# EAGLE board uart_gerber (EAGLE 8.5.0)
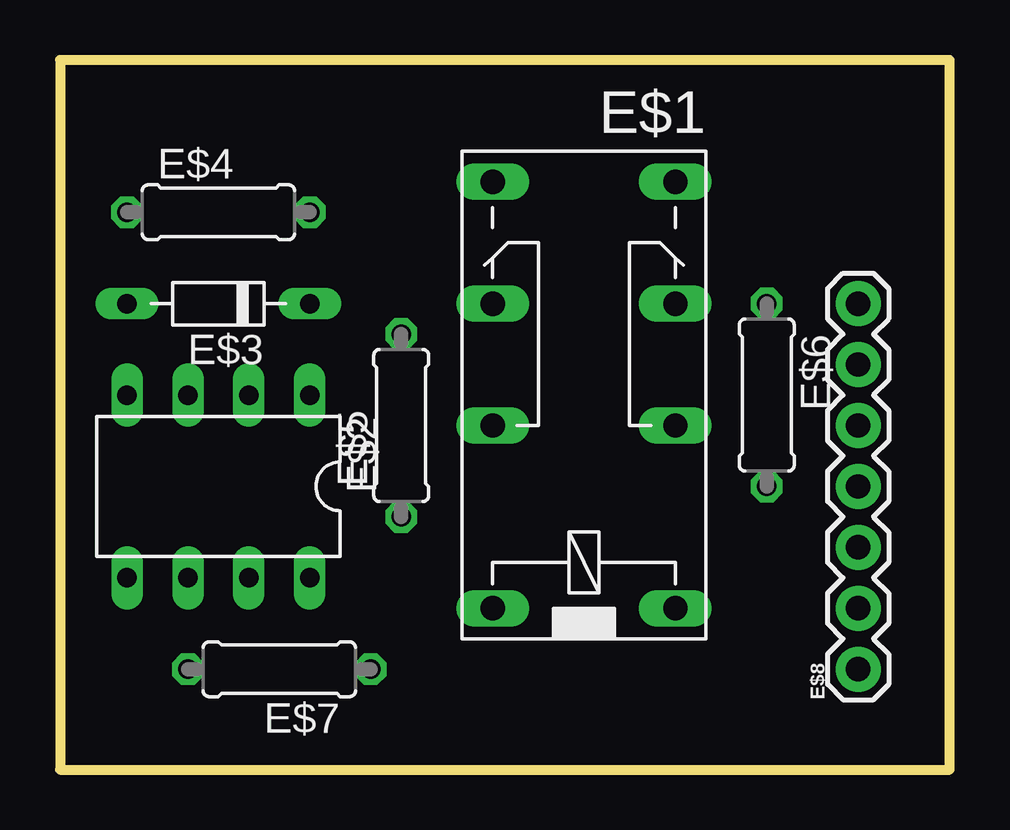
[diagram p0: board, top side]
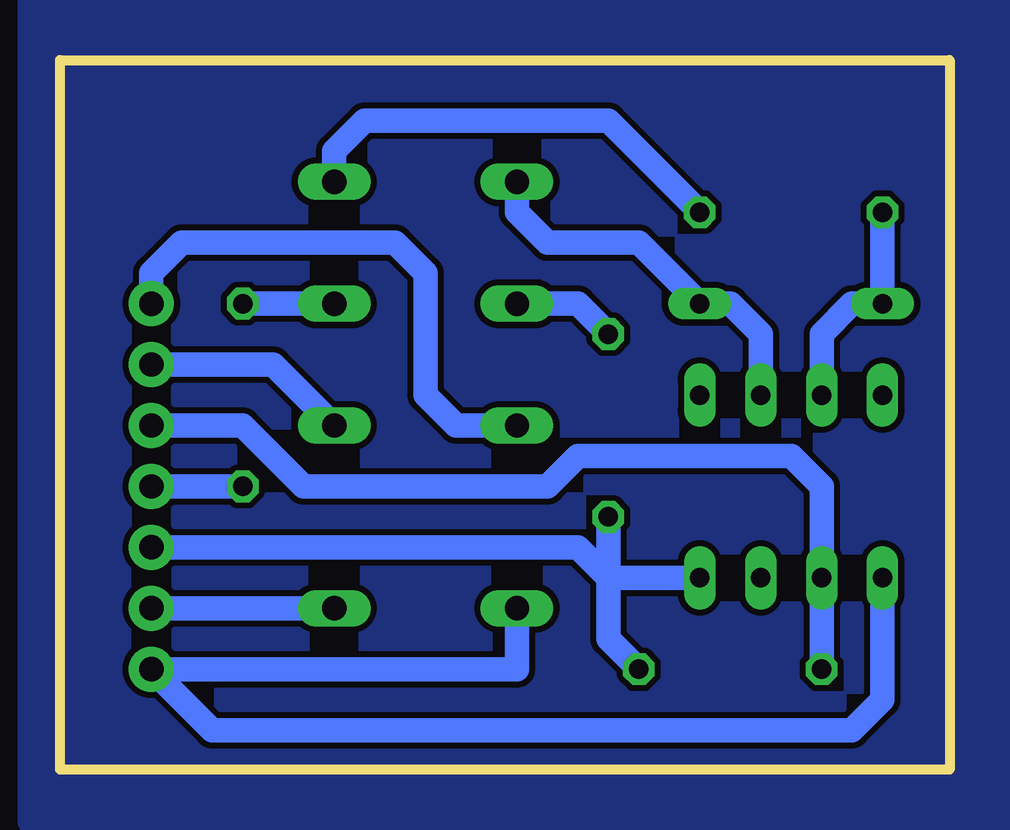
[diagram p1: board, bottom side, seen from below]

Size 37.08 x 29.59 mm. Coordinates in mm from the lower left corner, seen from the top.
Outline: 0,29.59 0,0 37.08,0 37.08,29.59 0,29.59
Copper layers (1*16): Top 0.035mm / dielectric 1.5mm / Bottom 0.035mm
Design rules "default *": minimum track width 6mil, minimum drill 0.35mm, track to track 6mil, track to pad 6mil, pad to pad 6mil, via to via 6mil, smd to smd 6mil, copper to edge 0mil, drill to drill 6mil, minimum pad ring 10mil, minimum via ring 8mil, stop-mask expansion 4mil, vias tented up to drill 0mil, thermal gap 10mil

## Footprints (pad centres in the part's own frame; a part is rotated, then mirrored left to right if it is on the bottom)
351 = drill 1.016 long: 1 -3.81,-3.81; 16 -3.81,3.81; O1 8.89,-3.81; O2 8.89,3.81; P1 3.81,-3.81; P2 3.81,3.81; S1 13.97,-3.81; S2 13.97,3.81
DIL08 = drill 0.813 long: 1 -3.81,-3.81; 2 -1.27,-3.81; 3 1.27,-3.81; 4 3.81,-3.81; 5 3.81,3.81; 6 1.27,3.81; 7 -1.27,3.81; 8 -3.81,3.81
D-7.5 = drill 0.813 long: A 3.81,0; C -3.81,0
0207/7 = drill 0.813 octagon: 1 -3.81,0; 2 3.81,0
1X07 = drill 1.016 pad 1.88: 1 0,0; 2 2.54,0; 3 5.08,0; 4 7.62,0; 5 10.16,0; 6 12.7,0; 7 15.24,0

## Placement (x,y rotation side)
E$1  [351]  21.84,10.54 90 top
E$2  [DIL08]  6.6,11.81 180 top
E$3  [D-7.5]  6.6,19.43 180 top
E$4  [0207/7]  6.6,23.24 0 top
E$5  [0207/7]  14.22,14.35 90 top
E$6  [0207/7]  29.46,15.62 270 top
E$7  [0207/7]  9.14,4.19 180 top
E$8  [1X07]  33.27,4.19 90 top

## Library data of the parts
E$1 = relay
E$2 = 74xx-eu
E$3 = diode
E$4-E$7 = BeagleBone_Black_Wireless
E$8 = SparkFun-Connectors

## Nets
S$1: E$1.1 E$8.2
S$2: E$1.P1 E$8.6
S$3: E$1.16 E$2.5 E$8.1
S$4: E$1.S2 E$2.2 E$3.C
S$5: E$2.3 E$3.A E$4.1
S$6: E$2.6 E$7.2 E$8.5
S$7: E$2.8 E$5.1 E$7.1 E$8.3
S$8: E$6.2 E$8.4
S$10: E$1.O2 E$5.2
S$11: E$1.P2 E$8.7
S$12: E$1.S1 E$4.2
S$13: E$1.O1 E$6.1

## Tracks (layer width: path | path; a pad name or v marks a point on that pad's centre or on a via)
S$1
  Bottom 1.016: E$1.1 E$8.2
S$2
  Bottom 1.016: E$1.P1 28.19,16.89 E$8.6
S$3
  Bottom 1.016: E$1.16 18.03,4.19 E$8.1 30.73,1.65 4.06,1.65 2.79,2.92 E$2.5
S$4
  Bottom 1.016: E$2.2 7.87,18.16 9.14,19.43 E$3.C 12.95,21.97 16.76,21.97 18.03,23.24 E$1.S2
S$5
  Bottom 1.016: E$4.1 E$3.A 4.06,19.43 5.33,18.16 E$2.3
S$6
  Bottom 1.016: E$7.2 E$2.6 5.33,11.81 6.6,13.08 15.49,13.08 16.76,11.81 26.92,11.81 29.46,14.35 E$8.5
S$7
  Bottom 1.016: E$7.1 14.22,5.46 14.22,8 | 14.22,8 E$5.1 | E$2.8 14.22,8 | 14.22,8 15.49,9.27 E$8.3
S$8
  Bottom 1.016: E$8.4 E$6.2
S$9
  pour Bottom (isolate 0.254): -3.56,32.13 -3.56,-2.16 38.35,-2.16 38.35,32.13
S$10
  Bottom 1.016: E$5.2 15.49,19.43 E$1.O2
S$11
  Bottom 1.016: E$1.P2 20.57,14.35 21.84,15.62 21.84,20.7 23.11,21.97 32,21.97 33.27,20.7 E$8.7
S$12
  Bottom 1.016: E$4.2 14.22,27.05 24.38,27.05 25.65,25.78 E$1.S1
S$13
  Bottom 1.016: E$1.O1 E$6.1